# Altium PCB TP4056 - 750mA 03962A Lithium Battery Charger Module v2.0_2023-09-13.pcbdoc
Units mil, origin at the board's own origin, x right, y up, seen from the top; angles counter-clockwise.
Board outline 2132.5 x 1729 mil, 2 copper layers (Top Layer, Bottom Layer); 26 components, 20 nets, 117 pads, 0 vias.
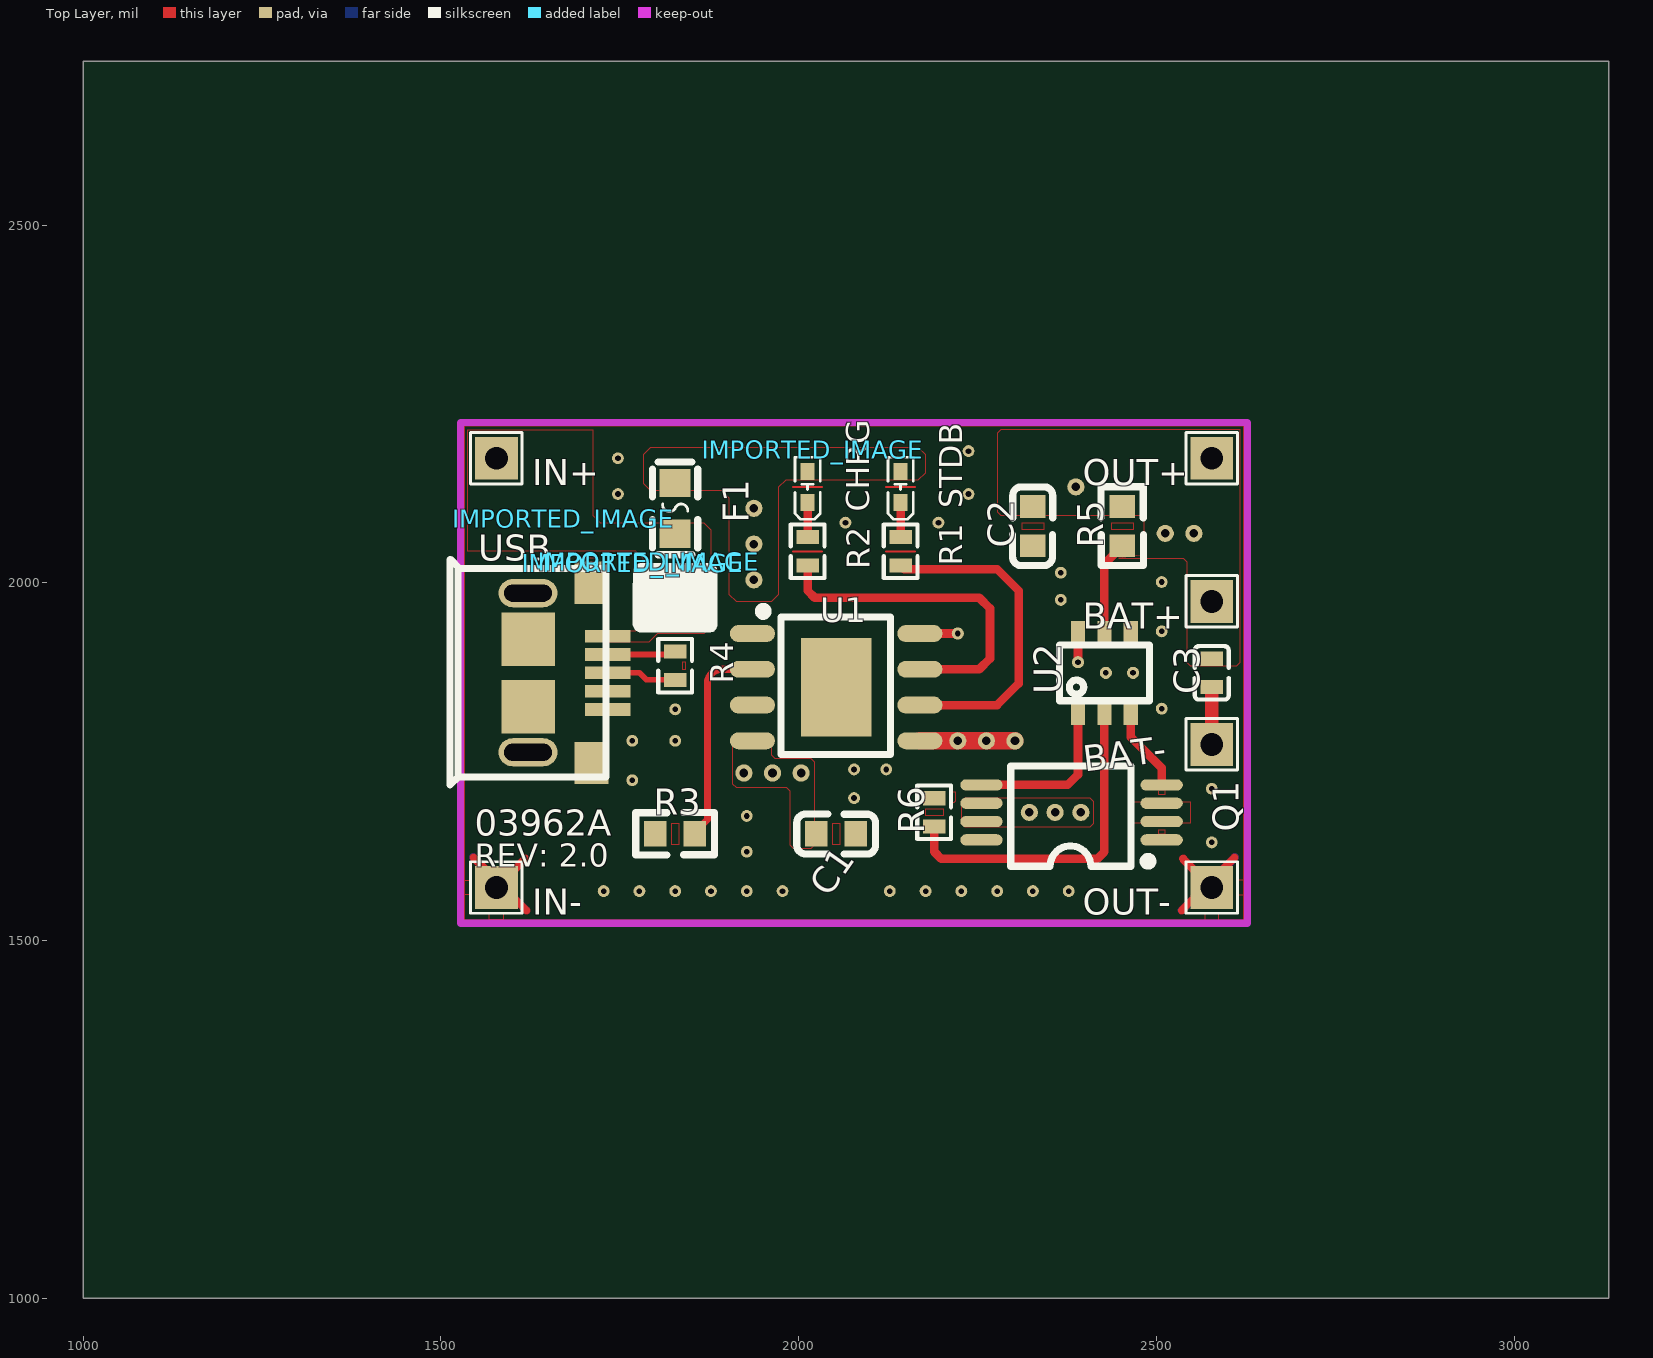
[diagram p0: Top Layer view]
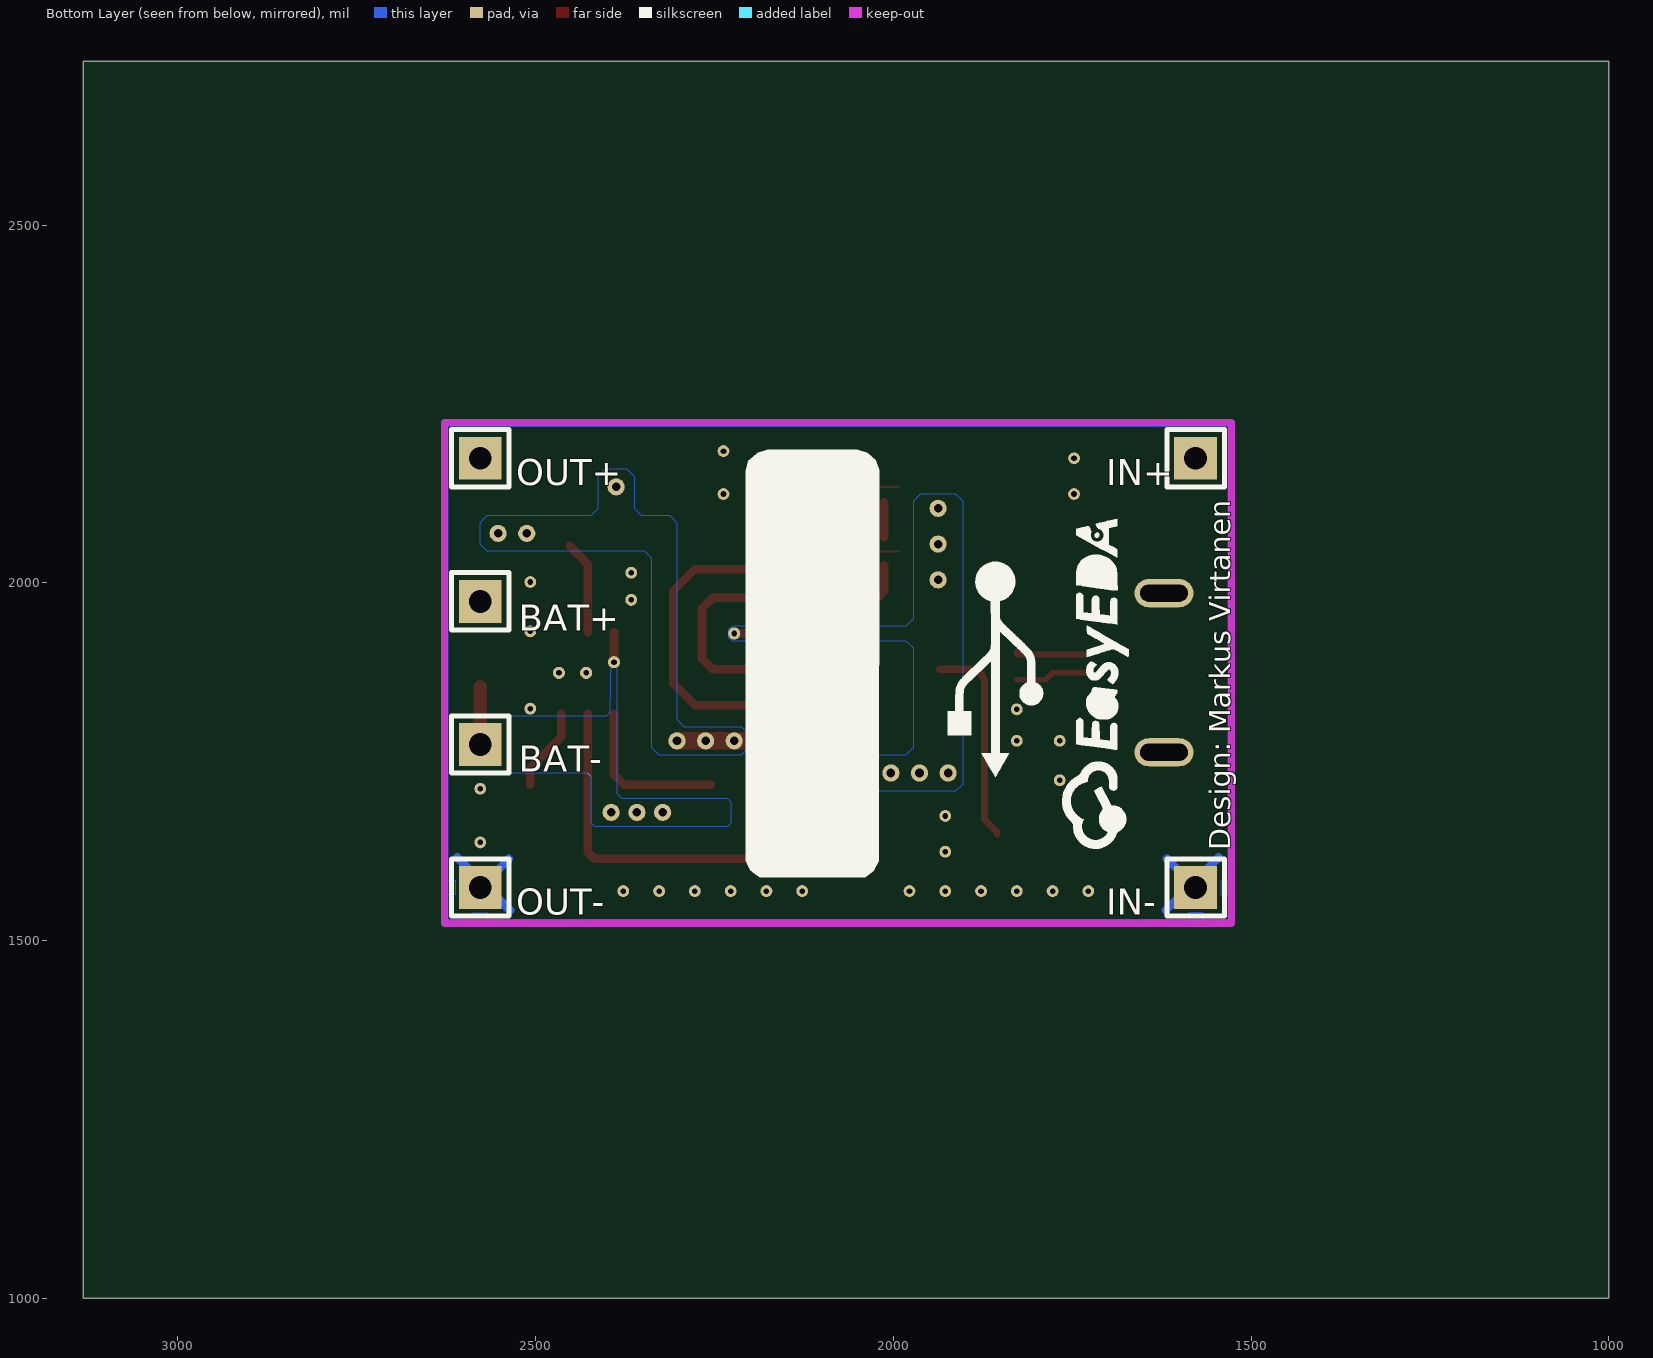
[diagram p1: Bottom Layer view, seen from below]

## Layer stack, top to bottom
Top Layer: signal copper (thickness not stored)
Dielectric: dielectric 12.6, FR-4, Dk 4.8
Bottom Layer: signal copper (thickness not stored)

## Board outline
3132.5,1000 1000,1000 1000,2729 3132.5,2729

## Components (designator, comment, footprint, x,y, rotation, side; value= is the part's Value field where it differs from the comment)
BAT+ "Pad 04" CON_PAD_SQUARE_32MIL 2577.5,1974 r0 top
BAT- "Pad 05" CON_PAD_SQUARE_32MIL 2577.5,1774 r0 top
C1 "10uF" C0603 2052.5,1649 r180 top
C2 "10uF" C0603 2327.5,2079 r90 top
C3 "100nF" C0402 2577.5,1874 r90 top
CHRG "16-213/BHC-AN1P2/3T" LED0402-RD 2012.5,2134 r90 top
F1 "1.0A" F0603 1827.5,2104 r90 top
IMPORTED_IMAGE "IMPORTED_IMAGE" IMPORTED_IMAGE 1790.74,2029.33 r0 top
IMPORTED_IMAGE "IMPORTED_IMAGE" IMPORTED_IMAGE 1671.13,2089.75 r0 top
IMPORTED_IMAGE "IMPORTED_IMAGE" IMPORTED_IMAGE 2020.05,2185.6 r0 top
IMPORTED_IMAGE "IMPORTED_IMAGE" IMPORTED_IMAGE 1768.43,2027.55 r0 top
IN+ "Pad 01" CON_PAD_SQUARE_32MIL 1577.5,2174 r0 top
IN- "Pad 02" CON_PAD_SQUARE_32MIL 1577.5,1574 r0 top
OUT+ "Pad 03" CON_PAD_SQUARE_32MIL 2577.5,2174 r0 top
OUT- "Pad 06" CON_PAD_SQUARE_32MIL 2577.5,1574 r0 top
Q1 "FS8205A" TSSOP-8_L4.4-W3.5-P0.65-LS6.4-BL 2381.5,1679 r90 top
R1 "1KΩ" R0402 2142.5,2044 r90 top
R2 "1KΩ" R0402 2012.5,2044 r90 top
R3 "1.6KΩ" R0603 1827.5,1649 r0 top
R4 "200" R0402 1827.5,1884 r90 top
R5 "100Ω" R0603 2452.5,2079 r90 top
R6 "1KΩ" R0402 2189.5,1679 r270 top
STDB "16-213/SDRC/S530-A3" LED0402-RD 2142.5,2134 r90 top
U1 "TP4056" SOP-8_EP_150MIL 2152.5,1774 r0 top
U2 "DW01A-G" SOT-23-6 2427.5,1874 r0 top
USB "micro 5PBoard5.9No column plus welding feet" MICRO-USB-SMD_5P-P0.65-H-F-C40955 1677.5,1874 r270 top

## Footprints (in the part's own frame and the unit in brackets; to place one, negate y for a bottom-side part, rotate by r counter-clockwise, add the part's x,y. Pads: shape width x height; smd on the part's side, far side on the other; paste and mask are expansions set on the pad)
C0402 [mm]
  rect 0.5x0.8 smd paste+0 mask+0.076: 1(-0.5,0) 2(0.5,0)
  silkscreen extent -0.95,-0.6 0.95,0.6
C0603 [mm]
  rect 0.8x0.9 smd paste+0 mask+0.102: 1(-0.7,0) 2(0.7,0)
  silkscreen extent -1.4,-0.7 1.4,0.72
CON_PAD_SQUARE_32MIL [mil]
  rect 60x60 hole 32 paste+0 mask+4: P(0,0)
F0603 [mm]
  rect 1x1.1 smd paste+0 mask+0.102: 1(-0.9,0) 2(0.9,0)
  silkscreen extent -1.65,-0.8 1.65,0.8
IMPORTED_IMAGE [mil]
LED0402-RD [mm]
  rect 0.6x0.5 smd paste+0 mask+0.076: 1(-0.55,0) 2(0.55,0)
  silkscreen extent -1.15,-0.45 1.05,0.45
MICRO-USB-SMD_5P-P0.65-H-F-C40955 [mm]
  rect 1.5x1.2 smd paste+0 mask+0.076: 0(-3.2,0.834) 0(3.2,0.834)
  oval 1x2.1 hole 0.6 slot 1.7 at 90 deg paste+0 mask+0.076: 0(-2.83,-1.416) 0(2.819,-1.416)
  rect 1.9x1.9 smd paste+0 mask+0.076: 0(-1.201,-1.415) 0(1.204,-1.415)
  rect 0.45x1.6 smd paste+0 mask+0.076: 1(-1.302,1.415) 2(-0.652,1.415) 3(-0.001,1.415) 4(0.649,1.415) 5(1.299,1.415)
  silkscreen extent -4.03,-4.19 3.98,1.35
R0402 [mm]
  rect 0.5x0.8 smd paste+0 mask+0.076: 1(-0.5,0) 2(0.5,0)
  silkscreen extent -0.95,-0.6 0.95,0.6
R0603 [mm]
  rect 0.8x0.9 smd paste+0 mask+0.102: 1(-0.7,0) 2(0.7,0)
  silkscreen extent -1.4,-0.75 1.4,0.76
SOP-8_EP_150MIL [mil]
  oval 62.99x23.62 smd paste+0 mask+4: 1(-217,155) 2(-217,105) 3(-217,55) 4(-217,5) 5(17,5) 6(17,55) 7(17,105) 8(17,155)
  rect 98.42x137.79 smd paste+0 mask+4: 9(-100,80)
  silkscreen extent -208,-14 -24,192
SOT-23-6 [mil]
  rect 20.1x31.5 smd paste+0 mask+4: 1(-37,-57) 2(0,-57) 3(37,-57) 4(37,57) 5(0,57) 6(-37,57)
  silkscreen extent -63,-39 63,39
TSSOP-8_L4.4-W3.5-P0.65-LS6.4-BL [mm]
  oval 0.4x1.5 smd paste+0 mask+0.076: 1(-0.975,-3.2) 2(-0.325,-3.2) 3(0.325,-3.2) 4(0.975,-3.2) 5(0.975,3.2) 6(0.325,3.2) 7(-0.325,3.2) 8(-0.975,3.2)
  silkscreen extent -1.92,-2.87 1.64,2.16

## Free pads (board coordinates)
  round 16.54 hole 7.87 paste+0 mask+2: ""(1727.5,1569) ""(1747.5,2124) ""(1747.5,2174) ""(1767.5,1724) ""(1767.5,1779) ""(1777.5,1569) ""(1827.5,1569) ""(1827.5,1779) ""(1827.5,1823) ""(1877.5,1569) ""(1927.5,1569) ""(1927.5,1624) ""(1927.5,1674) ""(1977.5,1569) ""(2065.5,2084) ""(2077.5,1699) ""(2077.5,1739) ""(2122.5,1739) ""(2127.5,1569) ""(2177.5,1569) ""(2195.5,2084) ""(2227.5,1569) ""(2237.5,2124) ""(2237.5,2184) ""(2277.5,1569) ""(2327.5,1569) ""(2366.5,1976) ""(2366.5,2014) ""(2377.5,1569) ""(2507.5,1824) ""(2507.5,1932) ""(2507.5,2001) ""(2577.5,1637) ""(2577.5,1712)
  round 24 hole 12 paste+0 mask+3: ""(1923.5,1734) ""(1937.5,2004) ""(1937.5,2054) ""(1937.5,2104) ""(1963.5,1734) ""(2003.5,1734) ""(2222.5,1779) ""(2262.5,1779) ""(2302.5,1779) ""(2387.5,2134) ""(2512.5,2069) ""(2552.5,2069)
  round 17 hole 8 paste+0 mask+2: ""(2222.5,1929) ""(2390.5,1889) ""(2429.5,1874) ""(2467.5,1874)
  round 24 hole 12 paste+0 mask+4: ""(2322.5,1679) ""(2358.5,1679) ""(2394.5,1679)

## Nets (pads, with @x,y where several pads share a name; then routed paths per layer and width w, separated by ;. In a path a pad name is that pad's centre, name@x,y a point inside that pad or via, vN(x,y) a via of type N, cw(c..) or ccw(c..) an arc to the next point about the centre after c; other vN are vias at no path point)
+5V: F1.1 IN+.P USB.1
BAT-_P: BAT-.P C3.1 pad.@2322.5,1679 pad.@2358.5,1679 pad.@2390.5,1889 pad.@2394.5,1679 Q1.6 Q1.7 U2.6 | length 122.3
  Top Layer w12: pad.@2390.5,1889 U2.6
  Top Layer w19: BAT-.P C3.1
GND: C1.1 C2.1 IN-.P OUT-.P pad.@1727.5,1569 pad.@1747.5,2124 pad.@1747.5,2174 pad.@1767.5,1724 pad.@1767.5,1779 pad.@1777.5,1569 pad.@1827.5,1569 pad.@1827.5,1779 pad.@1827.5,1823 pad.@1877.5,1569 pad.@1927.5,1569 pad.@1927.5,1624 pad.@1927.5,1674 pad.@1977.5,1569 pad.@2065.5,2084 pad.@2077.5,1699 pad.@2077.5,1739 pad.@2122.5,1739 pad.@2127.5,1569 pad.@2177.5,1569 pad.@2195.5,2084 pad.@2227.5,1569 pad.@2237.5,2124 pad.@2237.5,2184 pad.@2277.5,1569 pad.@2327.5,1569 pad.@2366.5,1976 pad.@2366.5,2014 pad.@2377.5,1569 pad.@2429.5,1874 pad.@2467.5,1874 pad.@2507.5,1824 pad.@2507.5,1932 pad.@2507.5,2001 pad.@2577.5,1637 pad.@2577.5,1712 Q1.2 Q1.3 R3.1 R6.1 U1.1 U1.3 USB.0 USB.5 | length 828.3
  Top Layer w3: 1992.5,2043.78 2032.5,2043.78 ; 1992.5,2134 2032.5,2134 ; 2122.5,2043.78 2162.5,2043.78 ; 2122.5,2134 2162.5,2134
  Top Layer w11: 1545.5,1616 1577.5,1584 IN-.P 1587.5,1574 1619.5,1542 ; 2535.5,1542 2567.5,1574 OUT-.P 2577.5,1584 2609.5,1616
  Top Layer w12: IN-.P 1617.5,1614 ; 2537.5,1614 OUT-.P
  Bottom Layer w12: 1545.5,1616 1577.5,1584 IN-.P ; 1617.5,1614 IN-.P ; 1619.5,1542 1587.5,1574 IN-.P ; 2535.5,1542 2567.5,1574 OUT-.P ; 2537.5,1614 OUT-.P ; 2609.5,1616 2577.5,1584 OUT-.P
KEEPOUT: 
OC: Q1.4 U2.3 | length 117.4
  Top Layer w12: U2.3 2464.5,1784 2507.5,1741 Q1.4
OD: Q1.5 U2.1 | length 226
  Top Layer w12: Q1.5 2375.9,1717.4 2390.5,1732 U2.1
R1_2: R1.2 STDB.1 | length 48.7
  Top Layer w12: R1.2 STDB.1@2142.5,2112.35
R2_2: CHRG.1 R2.2 | length 48.7
  Top Layer w12: R2.2 CHRG.1@2012.5,2112.35
R4_1: R4.1 USB.3 | length 98.3
  Top Layer w8: USB.3 1777.45,1874.05 1787.19,1864.31 R4.1
R4_2: R4.2 USB.2 | length 98.3
  Top Layer w8: USB.2 1827.5,1899.65 R4.2
S$68: 
S$4615: 
S$4652: 
U1_2: R3.2 U1.2 | length 291.6
  Top Layer w10: R3.2 1855.06,1651.56 1872.5,1669 1872.5,1859 cw(c1892.5,1859) 1892.5,1879 U1.2
U1_4: C1.2 CHRG.2 F1.2 pad.@1923.5,1734 pad.@1937.5,2004 pad.@1937.5,2054 pad.@1937.5,2104 pad.@1963.5,1734 pad.@2003.5,1734 pad.@2222.5,1929 STDB.2 U1.4 U1.8 | length 53
  Top Layer w12: U1.8 pad.@2222.5,1929
U1_5: BAT+.P C2.2 C3.2 OUT+.P pad.@2222.5,1779 pad.@2262.5,1779 pad.@2302.5,1779 pad.@2387.5,2134 pad.@2512.5,2069 pad.@2552.5,2069 R5.2 U1.5 | length 133
  Top Layer w24: U1.5 2222.5,1779 2262.5,1779 pad.@2302.5,1779
U1_6: R1.1 U1.6 | length 460
  Top Layer w12: R1.1 2147.8,2019 2277.5,2019 2307.5,1989 2307.5,1859 2277.5,1829 U1.6
U1_7: R2.1 U1.7 | length 474.9
  Top Layer w12: R2.1 2012.5,1989 2022.5,1979 2252.5,1979 2267.5,1964 2267.5,1894 2252.5,1879 U1.7
U2_2: R6.2 U2.2 | length 474.6
  Top Layer w12: R6.2 2189.5,1624 2199.5,1614 2417.5,1614 2427.5,1624 U2.2
U2_5: R5.1 U2.5 | length 130.8
  Top Layer w12: U2.5 2427.5,2026.44 R5.1
pads on no net: Q1.1 Q1.8 U1.9 U2.4 USB.4

## Polygon pours and split planes (outlines as drawn)
GND on Bottom Layer (solid): 1532.5,2219 1532.5,1529 2622.5,1529 2622.5,2219
U1_4 on Bottom Layer (solid): 1902.5,2114 1912.5,2124 1962.5,2124 1972.5,2114 1972.5,1949 1982.5,1939 2225.5,1939 2230.5,1934 2230.5,1924 2225.5,1919 1982.5,1919 1972.5,1909 1972.5,1769 1982.5,1759 2022.5,1759 2032.5,1749 2032.5,1719 2022.5,1709 1912.5,1709 1902.5,1719
U1_5 on Bottom Layer (solid): 2212.5,1799 2202.5,1789 2202.5,1769 2212.5,1759 2327.5,1759 2337.5,1769 2337.5,2034 2347.5,2044 2567.5,2044 2577.5,2054 2577.5,2084 2567.5,2094 2422.5,2094 2412.5,2104 2412.5,2149 2402.5,2159 2372.5,2159 2362.5,2149 2362.5,2104 2352.5,2094 2312.5,2094 2302.5,2084 2302.5,1809 2292.5,1799
BAT-_P on Bottom Layer (solid): 2617.5,1814 2400.5,1814 2395.5,1819 2394.5,1893 2391.5,1896 2389.5,1896 2386.5,1893 2386.5,1706 2379.5,1699 2232.5,1699 2227.5,1694 2227.5,1664 2232.5,1659 2417.5,1659 2422.5,1664 2422.5,1729 2427.5,1734 2617.5,1734
KEEPOUT on Bottom Layer (solid): 2622.5,1584 2612.5,1584 2612.5,1564 2622.5,1564
KEEPOUT on Bottom Layer (solid): 2587.5,1539 2567.5,1539 2567.5,1529 2587.5,1529
KEEPOUT on Bottom Layer (solid): 1567.5,1539 1587.5,1539 1587.5,1529 1567.5,1529
KEEPOUT on Bottom Layer (solid): 1532.5,1584 1542.5,1584 1542.5,1564 1532.5,1564
GND on Top Layer (solid): 1532.5,2219 1532.5,1529 2622.5,1529 2622.5,2219
+5V on Top Layer (solid): 1537.5,2214 1712.5,2214 1712.5,2094 1722.5,2084 1867.5,2084 1877.5,2074 1877.5,1939 1867.5,1929 1802.5,1929 1790.5,1917 1732.5,1917 1732.5,1933 1772.5,1933 1782.5,1943 1782.5,2034 1772.5,2044 1537.5,2044
U1_4 on Top Layer (solid): 1792.5,2189 1782.5,2179 1782.5,2139 1792.5,2129 1892.5,2129 1902.5,2119 1902.5,1984 1912.5,1974 1962.5,1974 1972.5,1984 1972.5,2134 1982.5,2144 2167.5,2144 2177.5,2154 2177.5,2179 2167.5,2189
U1_4 on Top Layer (solid): 1912.5,1784 1907.5,1779 1907.5,1719 1912.5,1714 1982.5,1714 1987.5,1709 1987.5,1634 1992.5,1629 2017.5,1629 2022.5,1634 2022.5,1749 2017.5,1754 1967.5,1754 1962.5,1759 1962.5,1784
U1_5 on Top Layer (solid): 2617.5,2214 2282.5,2214 2277.5,2209 2277.5,2099 2282.5,2094 2477.5,2094 2482.5,2089 2482.5,2039 2447.5,2034 2537.5,2034 2542.5,2029 2542.5,1889 2547.5,1884 2612.5,1884 2617.5,1889
BAT-_P on Top Layer (solid): 2232.5,1699 2227.5,1694 2227.5,1664 2232.5,1659 2407.5,1659 2412.5,1664 2412.5,1694 2407.5,1699
KEEPOUT on Top Layer (solid): 1837.5,1889 1837.5,1879 1842.5,1879 1842.5,1889
KEEPOUT on Top Layer (solid): 1702.5,2034 1702.5,2029 1717.5,2029 1717.5,2034
KEEPOUT on Top Layer (solid): 1822.5,1664 1832.5,1664 1832.5,1634 1822.5,1634
KEEPOUT on Top Layer (solid): 2047.5,1664 2057.5,1664 2057.5,1634 2047.5,1634
KEEPOUT on Top Layer (solid): 2177.5,1684 2202.5,1684 2202.5,1674 2177.5,1674
KEEPOUT on Top Layer (solid): 2312.5,2084 2342.5,2084 2342.5,2074 2312.5,2074
KEEPOUT on Top Layer (solid): 2622.5,1584 2612.5,1584 2612.5,1564 2622.5,1564
KEEPOUT on Top Layer (solid): 2587.5,1539 2567.5,1539 2567.5,1529 2587.5,1529
KEEPOUT on Top Layer (solid): 2219.5,1707 2211.5,1707 2211.5,1693 2217.5,1693 2219.5,1695
KEEPOUT on Top Layer (solid): 2502.5,1709 2502.5,1704 2512.5,1704 2512.5,1709
KEEPOUT on Top Layer (solid): 2502.5,1654 2502.5,1649 2512.5,1649 2512.5,1654
KEEPOUT on Top Layer (solid): 1567.5,1539 1587.5,1539 1587.5,1529 1567.5,1529
KEEPOUT on Top Layer (solid): 1532.5,1584 1542.5,1584 1542.5,1564 1532.5,1564
KEEPOUT on Top Layer (solid): 2437.5,2084 2467.5,2084 2467.5,2074 2437.5,2074
GND on Top Layer (solid): 2547.5,1694 2547.5,1664 2467.5,1664 2467.5,1694

## Silkscreen, mask and mechanical layers (free items; w line width, h text height)
Top Overlay:
  lines w4 net S$4652: 1541.5,1538 1613.5,1538 1613.5,1610 1541.5,1610 1541.5,1538 ; 1541.5,2138 1613.5,2138 1613.5,2210 1541.5,2210 1541.5,2138 ; 2541.5,1538 2613.5,1538 2613.5,1610 2541.5,1610 2541.5,1538 ; 2541.5,1738 2613.5,1738 2613.5,1810 2541.5,1810 2541.5,1738 ; 2541.5,1938 2613.5,1938 2613.5,2010 2541.5,2010 2541.5,1938 ; 2541.5,2138 2613.5,2138 2613.5,2210 2541.5,2210 2541.5,2138
  text "03962A" at 1547.5,1646 h36
  text "REV: 2.0" at 1547.5,1603 h32
Bottom Overlay:
  lines w7 net S$4615: 1537.5,1534 1537.5,1614 1617.5,1614 1617.5,1534 1537.5,1534 ; 1537.5,2134 1537.5,2214 1617.5,2214 1617.5,2134 1537.5,2134 ; 2537.5,1534 2537.5,1614 2617.5,1614 2617.5,1534 2537.5,1534 ; 2537.5,1734 2537.5,1814 2617.5,1814 2617.5,1734 2537.5,1734 ; 2537.5,1934 2537.5,2014 2617.5,2014 2617.5,1934 2537.5,1934 ; 2537.5,2134 2537.5,2214 2617.5,2214 2617.5,2134 2537.5,2134
  text "IN+" at 1702.5,2136 h36
  text "OUT+" at 2527.5,2136 h36
  text "BAT+" at 2523.5,1933 h36
  text "BAT-" at 2523.5,1736 h36
  text "Design: Markus Virtanen" at 1529,1626 h29 r270
  text "IN-" at 1702.5,1536 h36
  text "OUT-" at 2527.5,1536 h36
Document:
  lines w0.1: 2066.24,1864.49 2066.26,1864.51